# EAGLE board ft231x-breakout-Panel-v11 (EAGLE 7.5.0), part 1 of 9
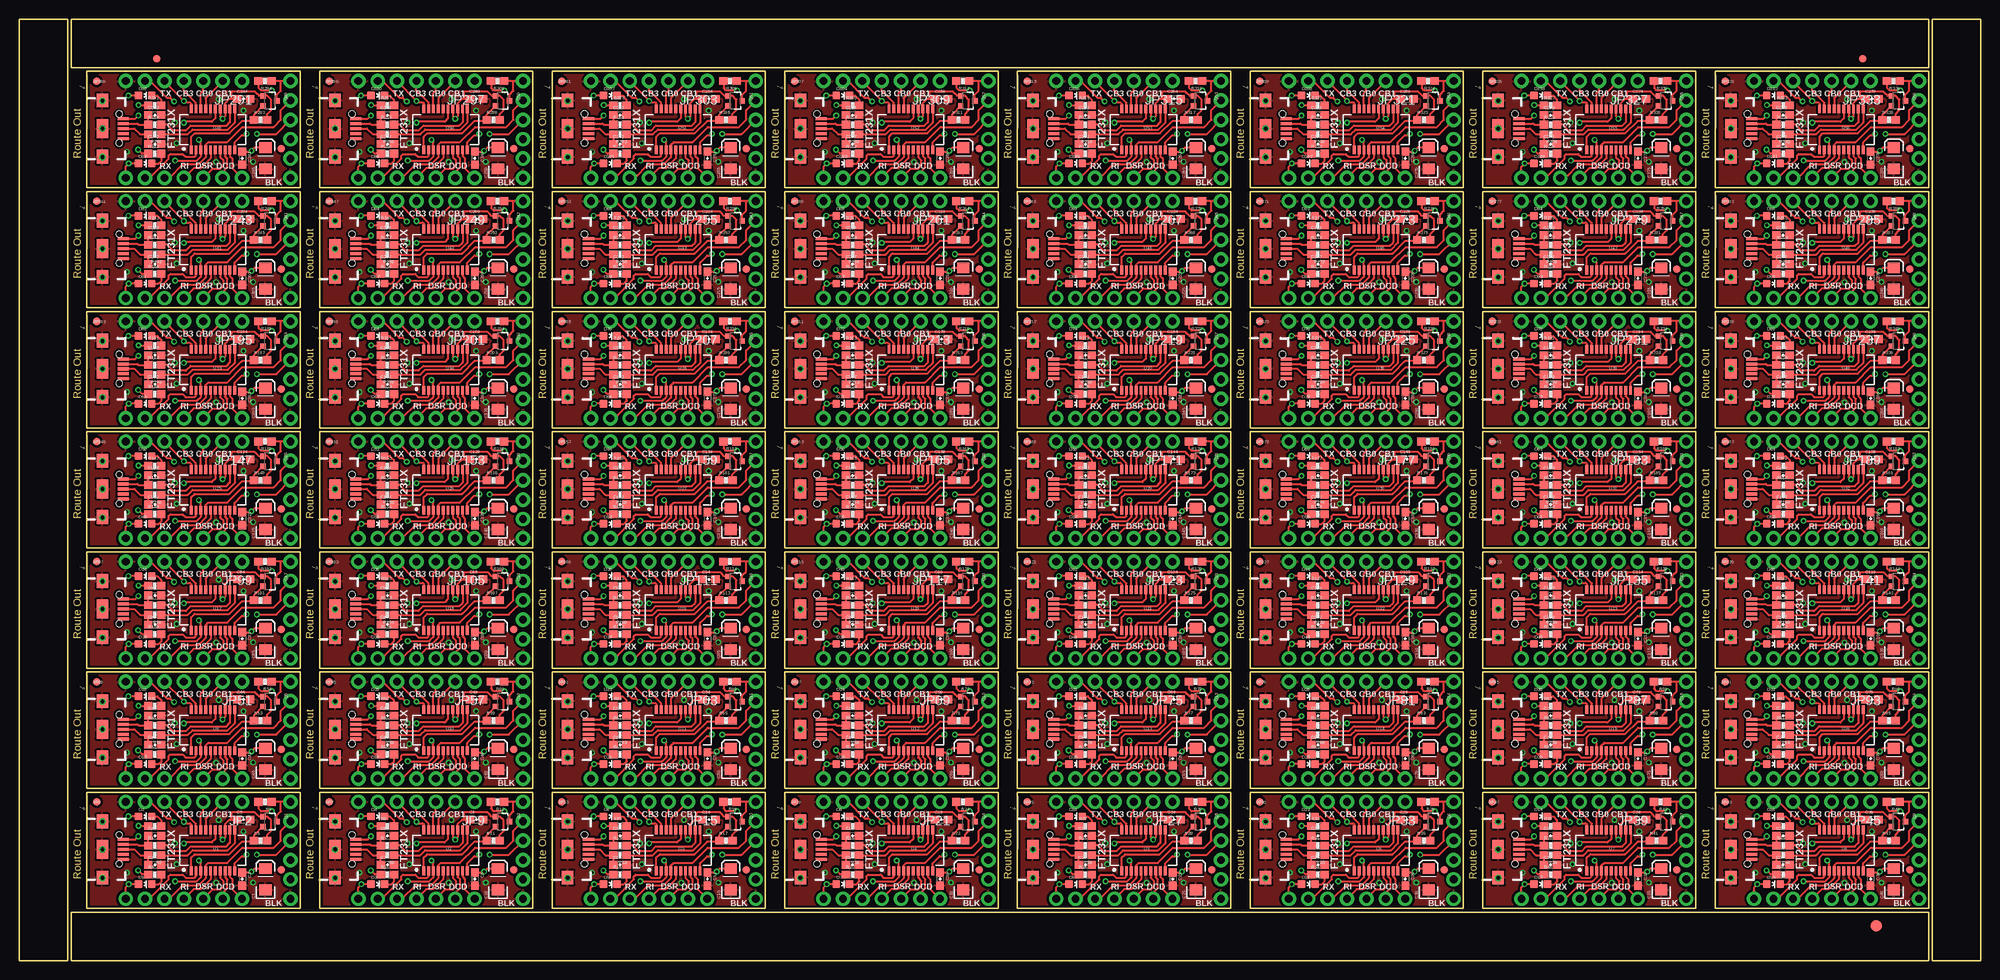
[diagram p0: board, top side]
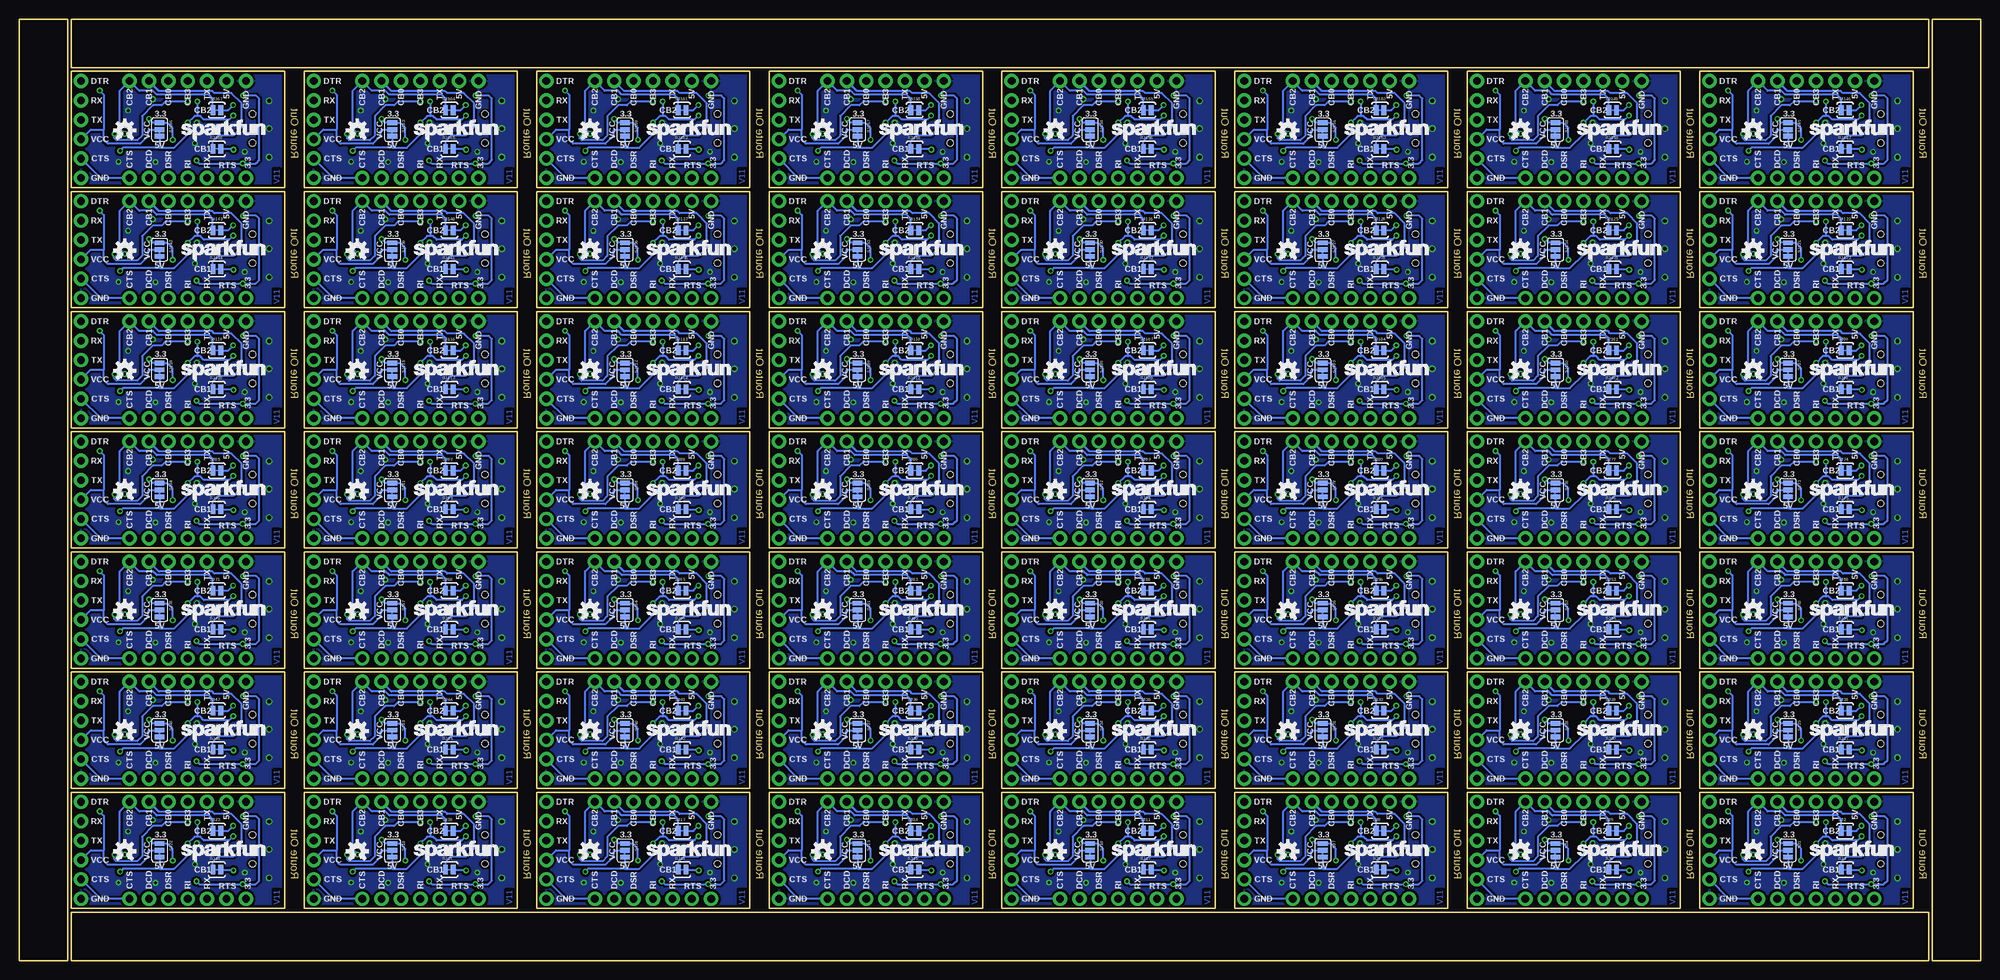
[diagram p1: board, bottom side, seen from below]

Size 257.05 x 123.44 mm. Coordinates in mm from the lower left corner, seen from the top.
Outline: 248 segments
Copper layers (1*16): Top 0.035mm / dielectric 1.5mm / Bottom 0.035mm
Design rules "SparkFun-2-layer-TIGHT": minimum track width 7mil, minimum drill 15mil, track to track 7mil, track to pad 7mil, pad to pad 7mil, via to via 7mil, smd to smd 7mil, copper to edge 7mil, drill to drill 7mil, minimum pad ring 7mil, minimum via ring 7mil, stop-mask expansion 4mil, vias tented up to drill 20mil, thermal gap 10mil

## Footprints (pad centres in the part's own frame; a part is rotated, then mirrored left to right if it is on the bottom)
EIA3216 = smd 1.4 x 1.6: A 1.4,0; C -1.4,0
0603-CAP = smd 1.1 x 1: 1 -0.85,0; 2 0.85,0
LED-0603 = smd 1 x 1: A 0,-0.877; C 0,0.877
FIDUCIAL-1.5X3 = smd 1.5 x 1.5: 1 0,0
FIDUCIAL-1X2 = smd 1 x 1: 1 0,0
USB-B-MICRO-SMD_V03 = smd 1.45 x 0.4: D+1 2.725,0; D-1 2.725,0.65; GND1 2.725,-1.3; ID1 2.725,-0.65; VBUS1 2.725,1.3 | smd 1.5 x 1.8: SHIELD1 0,3.685; SHIELD2 0,-3.685 | smd 1.5 x 2.5: SHIELD3 0,0 | hole 0.85: 2.2,1.9; 2.2,-1.9
1X07_NO_SILK = drill 1.016 pad 1.88: 1 0,0; 2 2.54,0; 3 5.08,0; 4 7.62,0; 5 10.16,0; 6 12.7,0; 7 15.24,0
1X06_NO_SILK = drill 1.016 pad 1.88: 1 0,0; 2 2.54,0; 3 5.08,0; 4 7.62,0; 5 10.16,0; 6 12.7,0
SOT323 = smd 0.7 x 0.7: 1 -0.65,-0.925; 2 0.65,-0.925; 3 0,0.925
0603-RES = smd 1.1 x 1: 1 -0.85,0; 2 0.85,0
0603-RES@1 = smd 1.1 x 1: 1 -0.85,0; 2 0.85,0
SJ_3 = smd 0.635 x 1.27: 1 -0.889,0; 2 0,0; 3 0.889,0
SJ_2S-TRACE = smd 0.635 x 1.27: 1 -0.508,0; 2 0.508,0
PAD-JUMPER-2-NC_BY_TRACE_YES_SILK = smd 0.635 x 1.27: 1 -0.508,0; 2 0.508,0
SSOP20_L = smd 0.381 x 1.143: 1 -2.857,-2.68; 2 -2.223,-2.68; 3 -1.587,-2.68; 4 -0.953,-2.68; 5 -0.318,-2.68; 6 0.318,-2.68; 7 0.953,-2.68; 8 1.587,-2.68; 9 2.223,-2.68; 10 2.857,-2.68; 11 2.857,2.68; 12 2.223,2.68; 13 1.587,2.68; 14 0.953,2.68; 15 0.318,2.68; 16 -0.318,2.68; 17 -0.953,2.68; 18 -1.587,2.68; 19 -2.223,2.68; 20 -2.857,2.68

## Placement (x,y rotation side)
C1  10uF  [EIA3216]  32.28,10.69 90 top
C2  0.1uF  [0603-CAP]  29.24,10.72 270 top
C3  47pF  [0603-CAP]  17.78,12.57 0 top
C4  47pF  [0603-CAP]  17.78,16.38 0 top
C5  0.1uF  [0603-CAP]  29.43,18.5 0 top
C6  0.1uF  [0603-CAP]  59.72,10.72 270 top
C7  47pF  [0603-CAP]  48.26,12.57 0 top
C8  47pF  [0603-CAP]  48.26,16.38 0 top
C9  0.1uF  [0603-CAP]  59.91,18.5 0 top
C10  10uF  [EIA3216]  62.76,10.69 90 top
C11  0.1uF  [0603-CAP]  90.2,10.72 270 top
C12  47pF  [0603-CAP]  78.74,12.57 0 top
C13  47pF  [0603-CAP]  78.74,16.38 0 top
C14  0.1uF  [0603-CAP]  90.39,18.5 0 top
C15  10uF  [EIA3216]  93.24,10.69 90 top
C16  0.1uF  [0603-CAP]  120.68,10.72 270 top
C17  47pF  [0603-CAP]  109.22,12.57 0 top
C18  47pF  [0603-CAP]  109.22,16.38 0 top
C19  0.1uF  [0603-CAP]  120.87,18.5 0 top
C20  10uF  [EIA3216]  123.72,10.69 90 top
C21  0.1uF  [0603-CAP]  151.16,10.72 270 top
C22  47pF  [0603-CAP]  139.7,12.57 0 top
C23  47pF  [0603-CAP]  139.7,16.38 0 top
C24  0.1uF  [0603-CAP]  151.35,18.5 0 top
C25  10uF  [EIA3216]  154.2,10.69 90 top
C26  0.1uF  [0603-CAP]  181.64,10.72 270 top
C27  47pF  [0603-CAP]  170.18,12.57 0 top
C28  47pF  [0603-CAP]  170.18,16.38 0 top
C29  0.1uF  [0603-CAP]  181.83,18.5 0 top
C30  10uF  [EIA3216]  184.68,10.69 90 top
C31  0.1uF  [0603-CAP]  212.12,10.72 270 top
C32  47pF  [0603-CAP]  200.66,12.57 0 top
C33  47pF  [0603-CAP]  200.66,16.38 0 top
C34  0.1uF  [0603-CAP]  212.31,18.5 0 top
C35  10uF  [EIA3216]  215.16,10.69 90 top
C36  0.1uF  [0603-CAP]  242.6,10.72 270 top
C37  47pF  [0603-CAP]  231.14,12.57 0 top
C38  47pF  [0603-CAP]  231.14,16.38 0 top
C39  0.1uF  [0603-CAP]  242.79,18.5 0 top
C40  10uF  [EIA3216]  245.64,10.69 90 top
C41  0.1uF  [0603-CAP]  29.24,26.47 270 top
C42  47pF  [0603-CAP]  17.78,28.32 0 top
C43  47pF  [0603-CAP]  17.78,32.13 0 top
C44  0.1uF  [0603-CAP]  29.43,34.25 0 top
C45  10uF  [EIA3216]  32.28,26.44 90 top
C46  0.1uF  [0603-CAP]  59.72,26.47 270 top
C47  47pF  [0603-CAP]  48.26,28.32 0 top
C48  47pF  [0603-CAP]  48.26,32.13 0 top
C49  0.1uF  [0603-CAP]  59.91,34.25 0 top
C50  10uF  [EIA3216]  62.76,26.44 90 top
C51  0.1uF  [0603-CAP]  90.2,26.47 270 top
C52  47pF  [0603-CAP]  78.74,28.32 0 top
C53  47pF  [0603-CAP]  78.74,32.13 0 top
C54  0.1uF  [0603-CAP]  90.39,34.25 0 top
C55  10uF  [EIA3216]  93.24,26.44 90 top
C56  0.1uF  [0603-CAP]  120.68,26.47 270 top
C57  47pF  [0603-CAP]  109.22,28.32 0 top
C58  47pF  [0603-CAP]  109.22,32.13 0 top
C59  0.1uF  [0603-CAP]  120.87,34.25 0 top
C60  10uF  [EIA3216]  123.72,26.44 90 top
C61  0.1uF  [0603-CAP]  151.16,26.47 270 top
C62  47pF  [0603-CAP]  139.7,28.32 0 top
C63  47pF  [0603-CAP]  139.7,32.13 0 top
C64  0.1uF  [0603-CAP]  151.35,34.25 0 top
C65  10uF  [EIA3216]  154.2,26.44 90 top
C66  0.1uF  [0603-CAP]  181.64,26.47 270 top
C67  47pF  [0603-CAP]  170.18,28.32 0 top
C68  47pF  [0603-CAP]  170.18,32.13 0 top
C69  0.1uF  [0603-CAP]  181.83,34.25 0 top
C70  10uF  [EIA3216]  184.68,26.44 90 top
C71  0.1uF  [0603-CAP]  212.12,26.47 270 top
C72  47pF  [0603-CAP]  200.66,28.32 0 top
C73  47pF  [0603-CAP]  200.66,32.13 0 top
C74  0.1uF  [0603-CAP]  212.31,34.25 0 top
C75  10uF  [EIA3216]  215.16,26.44 90 top
C76  0.1uF  [0603-CAP]  242.6,26.47 270 top
C77  47pF  [0603-CAP]  231.14,28.32 0 top
C78  47pF  [0603-CAP]  231.14,32.13 0 top
C79  0.1uF  [0603-CAP]  242.79,34.25 0 top
C80  10uF  [EIA3216]  245.64,26.44 90 top
C81  0.1uF  [0603-CAP]  29.24,42.21 270 top
C82  47pF  [0603-CAP]  17.78,44.07 0 top
C83  47pF  [0603-CAP]  17.78,47.88 0 top
C84  0.1uF  [0603-CAP]  29.43,50 0 top
C85  10uF  [EIA3216]  32.28,42.19 90 top
C86  0.1uF  [0603-CAP]  59.72,42.21 270 top
C87  47pF  [0603-CAP]  48.26,44.07 0 top
C88  47pF  [0603-CAP]  48.26,47.88 0 top
C89  0.1uF  [0603-CAP]  59.91,50 0 top
C90  10uF  [EIA3216]  62.76,42.19 90 top
C91  0.1uF  [0603-CAP]  90.2,42.21 270 top
C92  47pF  [0603-CAP]  78.74,44.07 0 top
C93  47pF  [0603-CAP]  78.74,47.88 0 top
C94  0.1uF  [0603-CAP]  90.39,50 0 top
C95  10uF  [EIA3216]  93.24,42.19 90 top
C96  0.1uF  [0603-CAP]  120.68,42.21 270 top
C97  47pF  [0603-CAP]  109.22,44.07 0 top
C98  47pF  [0603-CAP]  109.22,47.88 0 top
C99  0.1uF  [0603-CAP]  120.87,50 0 top
C100  10uF  [EIA3216]  123.72,42.19 90 top
C101  0.1uF  [0603-CAP]  151.16,42.21 270 top
C102  47pF  [0603-CAP]  139.7,44.07 0 top
C103  47pF  [0603-CAP]  139.7,47.88 0 top
C104  0.1uF  [0603-CAP]  151.35,50 0 top
C105  10uF  [EIA3216]  154.2,42.19 90 top
C106  0.1uF  [0603-CAP]  181.64,42.21 270 top
C107  47pF  [0603-CAP]  170.18,44.07 0 top
C108  47pF  [0603-CAP]  170.18,47.88 0 top
C109  0.1uF  [0603-CAP]  181.83,50 0 top
C110  10uF  [EIA3216]  184.68,42.19 90 top
C111  0.1uF  [0603-CAP]  212.12,42.21 270 top
C112  47pF  [0603-CAP]  200.66,44.07 0 top
C113  47pF  [0603-CAP]  200.66,47.88 0 top
C114  0.1uF  [0603-CAP]  212.31,50 0 top
C115  10uF  [EIA3216]  215.16,42.19 90 top
C116  0.1uF  [0603-CAP]  242.6,42.21 270 top
C117  47pF  [0603-CAP]  231.14,44.07 0 top
C118  47pF  [0603-CAP]  231.14,47.88 0 top
C119  0.1uF  [0603-CAP]  242.79,50 0 top
C120  10uF  [EIA3216]  245.64,42.19 90 top
C121  0.1uF  [0603-CAP]  29.24,57.96 270 top
C122  47pF  [0603-CAP]  17.78,59.82 0 top
C123  47pF  [0603-CAP]  17.78,63.63 0 top
C124  0.1uF  [0603-CAP]  29.43,65.75 0 top
C125  10uF  [EIA3216]  32.28,57.94 90 top
C126  0.1uF  [0603-CAP]  59.72,57.96 270 top
C127  47pF  [0603-CAP]  48.26,59.82 0 top
C128  47pF  [0603-CAP]  48.26,63.63 0 top
C129  0.1uF  [0603-CAP]  59.91,65.75 0 top
C130  10uF  [EIA3216]  62.76,57.94 90 top
C131  0.1uF  [0603-CAP]  90.2,57.96 270 top
C132  47pF  [0603-CAP]  78.74,59.82 0 top
C133  47pF  [0603-CAP]  78.74,63.63 0 top
C134  0.1uF  [0603-CAP]  90.39,65.75 0 top
C135  10uF  [EIA3216]  93.24,57.94 90 top
C136  0.1uF  [0603-CAP]  120.68,57.96 270 top
C137  47pF  [0603-CAP]  109.22,59.82 0 top
C138  47pF  [0603-CAP]  109.22,63.63 0 top
C139  0.1uF  [0603-CAP]  120.87,65.75 0 top
C140  10uF  [EIA3216]  123.72,57.94 90 top
C141  0.1uF  [0603-CAP]  151.16,57.96 270 top
C142  47pF  [0603-CAP]  139.7,59.82 0 top
C143  47pF  [0603-CAP]  139.7,63.63 0 top
C144  0.1uF  [0603-CAP]  151.35,65.75 0 top
C145  10uF  [EIA3216]  154.2,57.94 90 top
C146  0.1uF  [0603-CAP]  181.64,57.96 270 top
C147  47pF  [0603-CAP]  170.18,59.82 0 top
C148  47pF  [0603-CAP]  170.18,63.63 0 top
C149  0.1uF  [0603-CAP]  181.83,65.75 0 top
C150  10uF  [EIA3216]  184.68,57.94 90 top
C151  0.1uF  [0603-CAP]  212.12,57.96 270 top
C152  47pF  [0603-CAP]  200.66,59.82 0 top
C153  47pF  [0603-CAP]  200.66,63.63 0 top
C154  0.1uF  [0603-CAP]  212.31,65.75 0 top
C155  10uF  [EIA3216]  215.16,57.94 90 top
C156  0.1uF  [0603-CAP]  242.6,57.96 270 top
C157  47pF  [0603-CAP]  231.14,59.82 0 top
C158  47pF  [0603-CAP]  231.14,63.63 0 top
C159  0.1uF  [0603-CAP]  242.79,65.75 0 top
C160  10uF  [EIA3216]  245.64,57.94 90 top
C161  0.1uF  [0603-CAP]  29.24,73.71 270 top
C162  47pF  [0603-CAP]  17.78,75.56 0 top
C163  47pF  [0603-CAP]  17.78,79.38 0 top
C164  0.1uF  [0603-CAP]  29.43,81.5 0 top
C165  10uF  [EIA3216]  32.28,73.69 90 top
C166  0.1uF  [0603-CAP]  59.72,73.71 270 top
C167  47pF  [0603-CAP]  48.26,75.56 0 top
C168  47pF  [0603-CAP]  48.26,79.38 0 top
C169  0.1uF  [0603-CAP]  59.91,81.5 0 top
C170  10uF  [EIA3216]  62.76,73.69 90 top
C171  0.1uF  [0603-CAP]  90.2,73.71 270 top
C172  47pF  [0603-CAP]  78.74,75.56 0 top
C173  47pF  [0603-CAP]  78.74,79.38 0 top
C174  0.1uF  [0603-CAP]  90.39,81.5 0 top
C175  10uF  [EIA3216]  93.24,73.69 90 top
C176  0.1uF  [0603-CAP]  120.68,73.71 270 top
C177  47pF  [0603-CAP]  109.22,75.56 0 top
C178  47pF  [0603-CAP]  109.22,79.38 0 top
C179  0.1uF  [0603-CAP]  120.87,81.5 0 top
C180  10uF  [EIA3216]  123.72,73.69 90 top
C181  0.1uF  [0603-CAP]  151.16,73.71 270 top
C182  47pF  [0603-CAP]  139.7,75.56 0 top
C183  47pF  [0603-CAP]  139.7,79.38 0 top
C184  0.1uF  [0603-CAP]  151.35,81.5 0 top
C185  10uF  [EIA3216]  154.2,73.69 90 top
C186  0.1uF  [0603-CAP]  181.64,73.71 270 top
C187  47pF  [0603-CAP]  170.18,75.56 0 top
C188  47pF  [0603-CAP]  170.18,79.38 0 top
C189  0.1uF  [0603-CAP]  181.83,81.5 0 top
C190  10uF  [EIA3216]  184.68,73.69 90 top
C191  0.1uF  [0603-CAP]  212.12,73.71 270 top
C192  47pF  [0603-CAP]  200.66,75.56 0 top
C193  47pF  [0603-CAP]  200.66,79.38 0 top
C194  0.1uF  [0603-CAP]  212.31,81.5 0 top
C195  10uF  [EIA3216]  215.16,73.69 90 top
C196  0.1uF  [0603-CAP]  242.6,73.71 270 top
C197  47pF  [0603-CAP]  231.14,75.56 0 top
C198  47pF  [0603-CAP]  231.14,79.38 0 top
C199  0.1uF  [0603-CAP]  242.79,81.5 0 top
C200  10uF  [EIA3216]  245.64,73.69 90 top
C201  0.1uF  [0603-CAP]  29.24,89.46 270 top
C202  47pF  [0603-CAP]  17.78,91.31 0 top
C203  47pF  [0603-CAP]  17.78,95.12 0 top
C204  0.1uF  [0603-CAP]  29.43,97.24 0 top
C205  10uF  [EIA3216]  32.28,89.43 90 top
C206  0.1uF  [0603-CAP]  59.72,89.46 270 top
C207  47pF  [0603-CAP]  48.26,91.31 0 top
C208  47pF  [0603-CAP]  48.26,95.12 0 top
C209  0.1uF  [0603-CAP]  59.91,97.24 0 top
C210  10uF  [EIA3216]  62.76,89.43 90 top
C211  0.1uF  [0603-CAP]  90.2,89.46 270 top
C212  47pF  [0603-CAP]  78.74,91.31 0 top
C213  47pF  [0603-CAP]  78.74,95.12 0 top
C214  0.1uF  [0603-CAP]  90.39,97.24 0 top
C215  10uF  [EIA3216]  93.24,89.43 90 top
C216  0.1uF  [0603-CAP]  120.68,89.46 270 top
C217  47pF  [0603-CAP]  109.22,91.31 0 top
C218  47pF  [0603-CAP]  109.22,95.12 0 top
C219  0.1uF  [0603-CAP]  120.87,97.24 0 top
C220  10uF  [EIA3216]  123.72,89.43 90 top
C221  0.1uF  [0603-CAP]  151.16,89.46 270 top
C222  47pF  [0603-CAP]  139.7,91.31 0 top
C223  47pF  [0603-CAP]  139.7,95.12 0 top
C224  0.1uF  [0603-CAP]  151.35,97.24 0 top
C225  10uF  [EIA3216]  154.2,89.43 90 top
C226  0.1uF  [0603-CAP]  181.64,89.46 270 top
C227  47pF  [0603-CAP]  170.18,91.31 0 top
C228  47pF  [0603-CAP]  170.18,95.12 0 top
C229  0.1uF  [0603-CAP]  181.83,97.24 0 top
C230  10uF  [EIA3216]  184.68,89.43 90 top
C231  0.1uF  [0603-CAP]  212.12,89.46 270 top
C232  47pF  [0603-CAP]  200.66,91.31 0 top
C233  47pF  [0603-CAP]  200.66,95.12 0 top
C234  0.1uF  [0603-CAP]  212.31,97.24 0 top
C235  10uF  [EIA3216]  215.16,89.43 90 top
C236  0.1uF  [0603-CAP]  242.6,89.46 270 top
C237  47pF  [0603-CAP]  231.14,91.31 0 top
C238  47pF  [0603-CAP]  231.14,95.12 0 top
C239  0.1uF  [0603-CAP]  242.79,97.24 0 top
C240  10uF  [EIA3216]  245.64,89.43 90 top
C241  0.1uF  [0603-CAP]  29.24,105.21 270 top
C242  47pF  [0603-CAP]  17.78,107.06 0 top
C243  47pF  [0603-CAP]  17.78,110.87 0 top
C244  0.1uF  [0603-CAP]  29.43,112.99 0 top
C245  10uF  [EIA3216]  32.28,105.18 90 top
C246  0.1uF  [0603-CAP]  59.72,105.21 270 top
C247  47pF  [0603-CAP]  48.26,107.06 0 top
C248  47pF  [0603-CAP]  48.26,110.87 0 top
C249  0.1uF  [0603-CAP]  59.91,112.99 0 top
C250  10uF  [EIA3216]  62.76,105.18 90 top
C251  0.1uF  [0603-CAP]  90.2,105.21 270 top
C252  47pF  [0603-CAP]  78.74,107.06 0 top
C253  47pF  [0603-CAP]  78.74,110.87 0 top
C254  0.1uF  [0603-CAP]  90.39,112.99 0 top
C255  10uF  [EIA3216]  93.24,105.18 90 top
C256  0.1uF  [0603-CAP]  120.68,105.21 270 top
C257  47pF  [0603-CAP]  109.22,107.06 0 top
C258  47pF  [0603-CAP]  109.22,110.87 0 top
C259  0.1uF  [0603-CAP]  120.87,112.99 0 top
C260  10uF  [EIA3216]  123.72,105.18 90 top
C261  0.1uF  [0603-CAP]  151.16,105.21 270 top
C262  47pF  [0603-CAP]  139.7,107.06 0 top
C263  47pF  [0603-CAP]  139.7,110.87 0 top
C264  0.1uF  [0603-CAP]  151.35,112.99 0 top
C265  10uF  [EIA3216]  154.2,105.18 90 top
C266  0.1uF  [0603-CAP]  181.64,105.21 270 top
C267  47pF  [0603-CAP]  170.18,107.06 0 top
C268  47pF  [0603-CAP]  170.18,110.87 0 top
C269  0.1uF  [0603-CAP]  181.83,112.99 0 top
C270  10uF  [EIA3216]  184.68,105.18 90 top
C271  0.1uF  [0603-CAP]  212.12,105.21 270 top
C272  47pF  [0603-CAP]  200.66,107.06 0 top
C273  47pF  [0603-CAP]  200.66,110.87 0 top
C274  0.1uF  [0603-CAP]  212.31,112.99 0 top
C275  10uF  [EIA3216]  215.16,105.18 90 top
C276  0.1uF  [0603-CAP]  242.6,105.21 270 top
C277  47pF  [0603-CAP]  231.14,107.06 0 top
C278  47pF  [0603-CAP]  231.14,110.87 0 top
C279  0.1uF  [0603-CAP]  242.79,112.99 0 top
C280  10uF  [EIA3216]  245.64,105.18 90 top
D1  RED  [LED-0603]  16.51,10.03 270 top
D2  Yellow  [LED-0603]  16.51,18.92 270 top
D3  RED  [LED-0603]  46.99,10.03 270 top
D4  Yellow  [LED-0603]  46.99,18.92 270 top
D5  RED  [LED-0603]  77.47,10.03 270 top
D6  Yellow  [LED-0603]  77.47,18.92 270 top
D7  RED  [LED-0603]  107.95,10.03 270 top
D8  Yellow  [LED-0603]  107.95,18.92 270 top
D9  RED  [LED-0603]  138.43,10.03 270 top
D10  Yellow  [LED-0603]  138.43,18.92 270 top
D11  RED  [LED-0603]  168.91,10.03 270 top
D12  Yellow  [LED-0603]  168.91,18.92 270 top
D13  RED  [LED-0603]  199.39,10.03 270 top
D14  Yellow  [LED-0603]  199.39,18.92 270 top
D15  RED  [LED-0603]  229.87,10.03 270 top
D16  Yellow  [LED-0603]  229.87,18.92 270 top
D17  RED  [LED-0603]  16.51,25.78 270 top
D18  Yellow  [LED-0603]  16.51,34.67 270 top
D19  RED  [LED-0603]  46.99,25.78 270 top
D20  Yellow  [LED-0603]  46.99,34.67 270 top
D21  RED  [LED-0603]  77.47,25.78 270 top
D22  Yellow  [LED-0603]  77.47,34.67 270 top
D23  RED  [LED-0603]  107.95,25.78 270 top
D24  Yellow  [LED-0603]  107.95,34.67 270 top
D25  RED  [LED-0603]  138.43,25.78 270 top
D26  Yellow  [LED-0603]  138.43,34.67 270 top
D27  RED  [LED-0603]  168.91,25.78 270 top
D28  Yellow  [LED-0603]  168.91,34.67 270 top
D29  RED  [LED-0603]  199.39,25.78 270 top
D30  Yellow  [LED-0603]  199.39,34.67 270 top
D31  RED  [LED-0603]  229.87,25.78 270 top
D32  Yellow  [LED-0603]  229.87,34.67 270 top
D33  RED  [LED-0603]  16.51,41.53 270 top
D34  Yellow  [LED-0603]  16.51,50.42 270 top
D35  RED  [LED-0603]  46.99,41.53 270 top
D36  Yellow  [LED-0603]  46.99,50.42 270 top
D37  RED  [LED-0603]  77.47,41.53 270 top
D38  Yellow  [LED-0603]  77.47,50.42 270 top
D39  RED  [LED-0603]  107.95,41.53 270 top
D40  Yellow  [LED-0603]  107.95,50.42 270 top
D41  RED  [LED-0603]  138.43,41.53 270 top
D42  Yellow  [LED-0603]  138.43,50.42 270 top
D43  RED  [LED-0603]  168.91,41.53 270 top
D44  Yellow  [LED-0603]  168.91,50.42 270 top
D45  RED  [LED-0603]  199.39,41.53 270 top
D46  Yellow  [LED-0603]  199.39,50.42 270 top
D47  RED  [LED-0603]  229.87,41.53 270 top
D48  Yellow  [LED-0603]  229.87,50.42 270 top
D49  RED  [LED-0603]  16.51,57.28 270 top
D50  Yellow  [LED-0603]  16.51,66.17 270 top
D51  RED  [LED-0603]  46.99,57.28 270 top
D52  Yellow  [LED-0603]  46.99,66.17 270 top
D53  RED  [LED-0603]  77.47,57.28 270 top
D54  Yellow  [LED-0603]  77.47,66.17 270 top
D55  RED  [LED-0603]  107.95,57.28 270 top
D56  Yellow  [LED-0603]  107.95,66.17 270 top
D57  RED  [LED-0603]  138.43,57.28 270 top
D58  Yellow  [LED-0603]  138.43,66.17 270 top
D59  RED  [LED-0603]  168.91,57.28 270 top
D60  Yellow  [LED-0603]  168.91,66.17 270 top
D61  RED  [LED-0603]  199.39,57.28 270 top
D62  Yellow  [LED-0603]  199.39,66.17 270 top
D63  RED  [LED-0603]  229.87,57.28 270 top
D64  Yellow  [LED-0603]  229.87,66.17 270 top
D65  RED  [LED-0603]  16.51,73.03 270 top
D66  Yellow  [LED-0603]  16.51,81.92 270 top
D67  RED  [LED-0603]  46.99,73.03 270 top
D68  Yellow  [LED-0603]  46.99,81.92 270 top
D69  RED  [LED-0603]  77.47,73.03 270 top
D70  Yellow  [LED-0603]  77.47,81.92 270 top
D71  RED  [LED-0603]  107.95,73.03 270 top
D72  Yellow  [LED-0603]  107.95,81.92 270 top
D73  RED  [LED-0603]  138.43,73.03 270 top
D74  Yellow  [LED-0603]  138.43,81.92 270 top
D75  RED  [LED-0603]  168.91,73.03 270 top
D76  Yellow  [LED-0603]  168.91,81.92 270 top
D77  RED  [LED-0603]  199.39,73.03 270 top
D78  Yellow  [LED-0603]  199.39,81.92 270 top
D79  RED  [LED-0603]  229.87,73.03 270 top
D80  Yellow  [LED-0603]  229.87,81.92 270 top
D81  RED  [LED-0603]  16.51,88.77 270 top
D82  Yellow  [LED-0603]  16.51,97.66 270 top
D83  RED  [LED-0603]  46.99,88.77 270 top
D84  Yellow  [LED-0603]  46.99,97.66 270 top
D85  RED  [LED-0603]  77.47,88.77 270 top
D86  Yellow  [LED-0603]  77.47,97.66 270 top
D87  RED  [LED-0603]  107.95,88.77 270 top
D88  Yellow  [LED-0603]  107.95,97.66 270 top
D89  RED  [LED-0603]  138.43,88.77 270 top
D90  Yellow  [LED-0603]  138.43,97.66 270 top
D91  RED  [LED-0603]  168.91,88.77 270 top
D92  Yellow  [LED-0603]  168.91,97.66 270 top
D93  RED  [LED-0603]  199.39,88.77 270 top
D94  Yellow  [LED-0603]  199.39,97.66 270 top
D95  RED  [LED-0603]  229.87,88.77 270 top
D96  Yellow  [LED-0603]  229.87,97.66 270 top
D97  RED  [LED-0603]  16.51,104.52 270 top
D98  Yellow  [LED-0603]  16.51,113.41 270 top
D99  RED  [LED-0603]  46.99,104.52 270 top
D100  Yellow  [LED-0603]  46.99,113.41 270 top
D101  RED  [LED-0603]  77.47,104.52 270 top
D102  Yellow  [LED-0603]  77.47,113.41 270 top
D103  RED  [LED-0603]  107.95,104.52 270 top
D104  Yellow  [LED-0603]  107.95,113.41 270 top
D105  RED  [LED-0603]  138.43,104.52 270 top
D106  Yellow  [LED-0603]  138.43,113.41 270 top
D107  RED  [LED-0603]  168.91,104.52 270 top
D108  Yellow  [LED-0603]  168.91,113.41 270 top
D109  RED  [LED-0603]  199.39,104.52 270 top
D110  Yellow  [LED-0603]  199.39,113.41 270 top
D111  RED  [LED-0603]  229.87,104.52 270 top
D112  Yellow  [LED-0603]  229.87,113.41 270 top
E$1  [FIDUCIAL-1.5X3]  243.33,4.57 0 top
E$5  [FIDUCIAL-1X2]  241.55,118.24 90 top
E$6  [FIDUCIAL-1X2]  18.03,118.24 270 top
JP1  USB-MICROB"  [USB-B-MICRO-SMD_V03]  10.92,14.61 0 top
JP2  [1X07_NO_SILK]  29.21,20.83 180 top
JP3  [1X06_NO_SILK]  35.56,8.13 90 top
JP4  [1X07_NO_SILK]  29.21,8.13 180 top
JP5  FIDUCIAL1X2  [FIDUCIAL-1X2]  34.34,11.95 0 top
JP6  FIDUCIAL1X2  [FIDUCIAL-1X2]  10.16,20.83 0 top
JP7  USB-MICROB"  [USB-B-MICRO-SMD_V03]  41.4,14.61 0 top
JP8  [1X06_NO_SILK]  66.04,8.13 90 top
JP9  [1X07_NO_SILK]  59.69,20.83 180 top
JP10  [1X07_NO_SILK]  59.69,8.13 180 top
JP11  FIDUCIAL1X2  [FIDUCIAL-1X2]  40.64,20.83 0 top
JP12  FIDUCIAL1X2  [FIDUCIAL-1X2]  64.82,11.95 0 top
JP13  USB-MICROB"  [USB-B-MICRO-SMD_V03]  71.88,14.61 0 top
JP14  [1X06_NO_SILK]  96.52,8.13 90 top
JP15  [1X07_NO_SILK]  90.17,20.83 180 top
JP16  [1X07_NO_SILK]  90.17,8.13 180 top
JP17  FIDUCIAL1X2  [FIDUCIAL-1X2]  71.12,20.83 0 top
JP18  FIDUCIAL1X2  [FIDUCIAL-1X2]  95.3,11.95 0 top
JP19  USB-MICROB"  [USB-B-MICRO-SMD_V03]  102.36,14.61 0 top
JP20  [1X06_NO_SILK]  127,8.13 90 top
JP21  [1X07_NO_SILK]  120.65,20.83 180 top
JP22  [1X07_NO_SILK]  120.65,8.13 180 top
JP23  FIDUCIAL1X2  [FIDUCIAL-1X2]  101.6,20.83 0 top
JP24  FIDUCIAL1X2  [FIDUCIAL-1X2]  125.78,11.95 0 top
JP25  USB-MICROB"  [USB-B-MICRO-SMD_V03]  132.84,14.61 0 top
JP26  [1X06_NO_SILK]  157.48,8.13 90 top
JP27  [1X07_NO_SILK]  151.13,20.83 180 top
JP28  [1X07_NO_SILK]  151.13,8.13 180 top
JP29  FIDUCIAL1X2  [FIDUCIAL-1X2]  132.08,20.83 0 top
JP30  FIDUCIAL1X2  [FIDUCIAL-1X2]  156.26,11.95 0 top
JP31  USB-MICROB"  [USB-B-MICRO-SMD_V03]  163.32,14.61 0 top
JP32  [1X06_NO_SILK]  187.96,8.13 90 top
JP33  [1X07_NO_SILK]  181.61,20.83 180 top
JP34  [1X07_NO_SILK]  181.61,8.13 180 top
JP35  FIDUCIAL1X2  [FIDUCIAL-1X2]  162.56,20.83 0 top
JP36  FIDUCIAL1X2  [FIDUCIAL-1X2]  186.74,11.95 0 top
JP37  USB-MICROB"  [USB-B-MICRO-SMD_V03]  193.8,14.61 0 top
JP38  [1X06_NO_SILK]  218.44,8.13 90 top
JP39  [1X07_NO_SILK]  212.09,20.83 180 top
JP40  [1X07_NO_SILK]  212.09,8.13 180 top
JP41  FIDUCIAL1X2  [FIDUCIAL-1X2]  193.04,20.83 0 top
JP42  FIDUCIAL1X2  [FIDUCIAL-1X2]  217.22,11.95 0 top
JP43  USB-MICROB"  [USB-B-MICRO-SMD_V03]  224.28,14.61 0 top
JP44  [1X06_NO_SILK]  248.92,8.13 90 top
JP45  [1X07_NO_SILK]  242.57,20.83 180 top
JP46  [1X07_NO_SILK]  242.57,8.13 180 top
JP47  FIDUCIAL1X2  [FIDUCIAL-1X2]  223.52,20.83 0 top
JP48  FIDUCIAL1X2  [FIDUCIAL-1X2]  247.7,11.95 0 top
JP49  USB-MICROB"  [USB-B-MICRO-SMD_V03]  10.92,30.35 0 top
JP50  [1X06_NO_SILK]  35.56,23.88 90 top
JP51  [1X07_NO_SILK]  29.21,36.58 180 top
JP52  [1X07_NO_SILK]  29.21,23.88 180 top
JP53  FIDUCIAL1X2  [FIDUCIAL-1X2]  10.16,36.58 0 top
JP54  FIDUCIAL1X2  [FIDUCIAL-1X2]  34.34,27.7 0 top
JP55  USB-MICROB"  [USB-B-MICRO-SMD_V03]  41.4,30.35 0 top
JP56  [1X06_NO_SILK]  66.04,23.88 90 top
JP57  [1X07_NO_SILK]  59.69,36.58 180 top
JP58  [1X07_NO_SILK]  59.69,23.88 180 top
JP59  FIDUCIAL1X2  [FIDUCIAL-1X2]  40.64,36.58 0 top
JP60  FIDUCIAL1X2  [FIDUCIAL-1X2]  64.82,27.7 0 top
JP61  USB-MICROB"  [USB-B-MICRO-SMD_V03]  71.88,30.35 0 top
JP62  [1X06_NO_SILK]  96.52,23.88 90 top
JP63  [1X07_NO_SILK]  90.17,36.58 180 top
JP64  [1X07_NO_SILK]  90.17,23.88 180 top
JP65  FIDUCIAL1X2  [FIDUCIAL-1X2]  71.12,36.58 0 top
JP66  FIDUCIAL1X2  [FIDUCIAL-1X2]  95.3,27.7 0 top
JP67  USB-MICROB"  [USB-B-MICRO-SMD_V03]  102.36,30.35 0 top
JP68  [1X06_NO_SILK]  127,23.88 90 top
JP69  [1X07_NO_SILK]  120.65,36.58 180 top
JP70  [1X07_NO_SILK]  120.65,23.88 180 top
JP71  FIDUCIAL1X2  [FIDUCIAL-1X2]  101.6,36.58 0 top
JP72  FIDUCIAL1X2  [FIDUCIAL-1X2]  125.78,27.7 0 top
JP73  USB-MICROB"  [USB-B-MICRO-SMD_V03]  132.84,30.35 0 top
JP74  [1X06_NO_SILK]  157.48,23.88 90 top
JP75  [1X07_NO_SILK]  151.13,36.58 180 top
JP76  [1X07_NO_SILK]  151.13,23.88 180 top
JP77  FIDUCIAL1X2  [FIDUCIAL-1X2]  132.08,36.58 0 top
JP78  FIDUCIAL1X2  [FIDUCIAL-1X2]  156.26,27.7 0 top
JP79  USB-MICROB"  [USB-B-MICRO-SMD_V03]  163.32,30.35 0 top
JP80  [1X06_NO_SILK]  187.96,23.88 90 top
JP81  [1X07_NO_SILK]  181.61,36.58 180 top
JP82  [1X07_NO_SILK]  181.61,23.88 180 top
JP83  FIDUCIAL1X2  [FIDUCIAL-1X2]  162.56,36.58 0 top
JP84  FIDUCIAL1X2  [FIDUCIAL-1X2]  186.74,27.7 0 top
JP85  USB-MICROB"  [USB-B-MICRO-SMD_V03]  193.8,30.35 0 top
JP86  [1X06_NO_SILK]  218.44,23.88 90 top
JP87  [1X07_NO_SILK]  212.09,36.58 180 top
JP88  [1X07_NO_SILK]  212.09,23.88 180 top
JP89  FIDUCIAL1X2  [FIDUCIAL-1X2]  193.04,36.58 0 top
JP90  FIDUCIAL1X2  [FIDUCIAL-1X2]  217.22,27.7 0 top
JP91  USB-MICROB"  [USB-B-MICRO-SMD_V03]  224.28,30.35 0 top
JP92  [1X06_NO_SILK]  248.92,23.88 90 top
JP93  [1X07_NO_SILK]  242.57,36.58 180 top
JP94  [1X07_NO_SILK]  242.57,23.88 180 top
JP95  FIDUCIAL1X2  [FIDUCIAL-1X2]  223.52,36.58 0 top
JP96  FIDUCIAL1X2  [FIDUCIAL-1X2]  247.7,27.7 0 top
JP97  USB-MICROB"  [USB-B-MICRO-SMD_V03]  10.92,46.1 0 top
JP98  [1X06_NO_SILK]  35.56,39.62 90 top
JP99  [1X07_NO_SILK]  29.21,52.32 180 top
JP100  [1X07_NO_SILK]  29.21,39.62 180 top
JP101  FIDUCIAL1X2  [FIDUCIAL-1X2]  10.16,52.32 0 top
JP102  FIDUCIAL1X2  [FIDUCIAL-1X2]  34.34,43.45 0 top
JP103  USB-MICROB"  [USB-B-MICRO-SMD_V03]  41.4,46.1 0 top
JP104  [1X06_NO_SILK]  66.04,39.62 90 top
JP105  [1X07_NO_SILK]  59.69,52.32 180 top
JP106  [1X07_NO_SILK]  59.69,39.62 180 top
JP107  FIDUCIAL1X2  [FIDUCIAL-1X2]  40.64,52.32 0 top
JP108  FIDUCIAL1X2  [FIDUCIAL-1X2]  64.82,43.45 0 top
JP109  USB-MICROB"  [USB-B-MICRO-SMD_V03]  71.88,46.1 0 top
JP110  [1X06_NO_SILK]  96.52,39.62 90 top
JP111  [1X07_NO_SILK]  90.17,52.32 180 top
JP112  [1X07_NO_SILK]  90.17,39.62 180 top
JP113  FIDUCIAL1X2  [FIDUCIAL-1X2]  71.12,52.32 0 top
JP114  FIDUCIAL1X2  [FIDUCIAL-1X2]  95.3,43.45 0 top
JP115  USB-MICROB"  [USB-B-MICRO-SMD_V03]  102.36,46.1 0 top
JP116  [1X06_NO_SILK]  127,39.62 90 top
JP117  [1X07_NO_SILK]  120.65,52.32 180 top
JP118  [1X07_NO_SILK]  120.65,39.62 180 top
JP119  FIDUCIAL1X2  [FIDUCIAL-1X2]  101.6,52.32 0 top
JP120  FIDUCIAL1X2  [FIDUCIAL-1X2]  125.78,43.45 0 top
JP121  USB-MICROB"  [USB-B-MICRO-SMD_V03]  132.84,46.1 0 top
JP122  [1X06_NO_SILK]  157.48,39.62 90 top
JP123  [1X07_NO_SILK]  151.13,52.32 180 top
JP124  [1X07_NO_SILK]  151.13,39.62 180 top
JP125  FIDUCIAL1X2  [FIDUCIAL-1X2]  132.08,52.32 0 top
JP126  FIDUCIAL1X2  [FIDUCIAL-1X2]  156.26,43.45 0 top
JP127  USB-MICROB"  [USB-B-MICRO-SMD_V03]  163.32,46.1 0 top
JP128  [1X06_NO_SILK]  187.96,39.62 90 top
JP129  [1X07_NO_SILK]  181.61,52.32 180 top
JP130  [1X07_NO_SILK]  181.61,39.62 180 top
JP131  FIDUCIAL1X2  [FIDUCIAL-1X2]  162.56,52.32 0 top
JP132  FIDUCIAL1X2  [FIDUCIAL-1X2]  186.74,43.45 0 top
JP133  USB-MICROB"  [USB-B-MICRO-SMD_V03]  193.8,46.1 0 top
JP134  [1X06_NO_SILK]  218.44,39.62 90 top
JP135  [1X07_NO_SILK]  212.09,52.32 180 top
JP136  [1X07_NO_SILK]  212.09,39.62 180 top
JP137  FIDUCIAL1X2  [FIDUCIAL-1X2]  193.04,52.32 0 top
JP138  FIDUCIAL1X2  [FIDUCIAL-1X2]  217.22,43.45 0 top
JP139  USB-MICROB"  [USB-B-MICRO-SMD_V03]  224.28,46.1 0 top
JP140  [1X06_NO_SILK]  248.92,39.62 90 top
JP141  [1X07_NO_SILK]  242.57,52.32 180 top
JP142  [1X07_NO_SILK]  242.57,39.62 180 top
JP143  FIDUCIAL1X2  [FIDUCIAL-1X2]  223.52,52.32 0 top
JP144  FIDUCIAL1X2  [FIDUCIAL-1X2]  247.7,43.45 0 top
JP145  USB-MICROB"  [USB-B-MICRO-SMD_V03]  10.92,61.85 0 top
JP146  [1X06_NO_SILK]  35.56,55.37 90 top
JP147  [1X07_NO_SILK]  29.21,68.07 180 top
JP148  [1X07_NO_SILK]  29.21,55.37 180 top
JP149  FIDUCIAL1X2  [FIDUCIAL-1X2]  10.16,68.07 0 top
JP150  FIDUCIAL1X2  [FIDUCIAL-1X2]  34.34,59.19 0 top
JP151  USB-MICROB"  [USB-B-MICRO-SMD_V03]  41.4,61.85 0 top
JP152  [1X06_NO_SILK]  66.04,55.37 90 top
JP153  [1X07_NO_SILK]  59.69,68.07 180 top
JP154  [1X07_NO_SILK]  59.69,55.37 180 top
JP155  FIDUCIAL1X2  [FIDUCIAL-1X2]  40.64,68.07 0 top
JP156  FIDUCIAL1X2  [FIDUCIAL-1X2]  64.82,59.19 0 top
JP157  USB-MICROB"  [USB-B-MICRO-SMD_V03]  71.88,61.85 0 top
JP158  [1X06_NO_SILK]  96.52,55.37 90 top
JP159  [1X07_NO_SILK]  90.17,68.07 180 top
JP160  [1X07_NO_SILK]  90.17,55.37 180 top
JP161  FIDUCIAL1X2  [FIDUCIAL-1X2]  71.12,68.07 0 top
JP162  FIDUCIAL1X2  [FIDUCIAL-1X2]  95.3,59.19 0 top
JP163  USB-MICROB"  [USB-B-MICRO-SMD_V03]  102.36,61.85 0 top
JP164  [1X06_NO_SILK]  127,55.37 90 top
JP165  [1X07_NO_SILK]  120.65,68.07 180 top
JP166  [1X07_NO_SILK]  120.65,55.37 180 top
JP167  FIDUCIAL1X2  [FIDUCIAL-1X2]  101.6,68.07 0 top
JP168  FIDUCIAL1X2  [FIDUCIAL-1X2]  125.78,59.19 0 top
JP169  USB-MICROB"  [USB-B-MICRO-SMD_V03]  132.84,61.85 0 top
JP170  [1X06_NO_SILK]  157.48,55.37 90 top
JP171  [1X07_NO_SILK]  151.13,68.07 180 top
JP172  [1X07_NO_SILK]  151.13,55.37 180 top
JP173  FIDUCIAL1X2  [FIDUCIAL-1X2]  132.08,68.07 0 top
JP174  FIDUCIAL1X2  [FIDUCIAL-1X2]  156.26,59.19 0 top
JP175  USB-MICROB"  [USB-B-MICRO-SMD_V03]  163.32,61.85 0 top
JP176  [1X06_NO_SILK]  187.96,55.37 90 top
JP177  [1X07_NO_SILK]  181.61,68.07 180 top
JP178  [1X07_NO_SILK]  181.61,55.37 180 top
JP179  FIDUCIAL1X2  [FIDUCIAL-1X2]  162.56,68.07 0 top
JP180  FIDUCIAL1X2  [FIDUCIAL-1X2]  186.74,59.19 0 top
JP181  USB-MICROB"  [USB-B-MICRO-SMD_V03]  193.8,61.85 0 top
JP182  [1X06_NO_SILK]  218.44,55.37 90 top
JP183  [1X07_NO_SILK]  212.09,68.07 180 top
JP184  [1X07_NO_SILK]  212.09,55.37 180 top
JP185  FIDUCIAL1X2  [FIDUCIAL-1X2]  193.04,68.07 0 top
JP186  FIDUCIAL1X2  [FIDUCIAL-1X2]  217.22,59.19 0 top
JP187  USB-MICROB"  [USB-B-MICRO-SMD_V03]  224.28,61.85 0 top
JP188  [1X06_NO_SILK]  248.92,55.37 90 top
JP189  [1X07_NO_SILK]  242.57,68.07 180 top
JP190  [1X07_NO_SILK]  242.57,55.37 180 top
JP191  FIDUCIAL1X2  [FIDUCIAL-1X2]  223.52,68.07 0 top
JP192  FIDUCIAL1X2  [FIDUCIAL-1X2]  247.7,59.19 0 top
JP193  USB-MICROB"  [USB-B-MICRO-SMD_V03]  10.92,77.6 0 top
JP194  [1X06_NO_SILK]  35.56,71.12 90 top
JP195  [1X07_NO_SILK]  29.21,83.82 180 top
JP196  [1X07_NO_SILK]  29.21,71.12 180 top
JP197  FIDUCIAL1X2  [FIDUCIAL-1X2]  10.16,83.82 0 top
JP198  FIDUCIAL1X2  [FIDUCIAL-1X2]  34.34,74.94 0 top
JP199  USB-MICROB"  [USB-B-MICRO-SMD_V03]  41.4,77.6 0 top
JP200  [1X06_NO_SILK]  66.04,71.12 90 top
JP201  [1X07_NO_SILK]  59.69,83.82 180 top
JP202  [1X07_NO_SILK]  59.69,71.12 180 top
JP203  FIDUCIAL1X2  [FIDUCIAL-1X2]  40.64,83.82 0 top
JP204  FIDUCIAL1X2  [FIDUCIAL-1X2]  64.82,74.94 0 top
JP205  USB-MICROB"  [USB-B-MICRO-SMD_V03]  71.88,77.6 0 top
JP206  [1X06_NO_SILK]  96.52,71.12 90 top
JP207  [1X07_NO_SILK]  90.17,83.82 180 top
JP208  [1X07_NO_SILK]  90.17,71.12 180 top
JP209  FIDUCIAL1X2  [FIDUCIAL-1X2]  71.12,83.82 0 top
JP210  FIDUCIAL1X2  [FIDUCIAL-1X2]  95.3,74.94 0 top
JP211  USB-MICROB"  [USB-B-MICRO-SMD_V03]  102.36,77.6 0 top
JP212  [1X06_NO_SILK]  127,71.12 90 top
JP213  [1X07_NO_SILK]  120.65,83.82 180 top
JP214  [1X07_NO_SILK]  120.65,71.12 180 top
JP215  FIDUCIAL1X2  [FIDUCIAL-1X2]  101.6,83.82 0 top
JP216  FIDUCIAL1X2  [FIDUCIAL-1X2]  125.78,74.94 0 top
JP217  USB-MICROB"  [USB-B-MICRO-SMD_V03]  132.84,77.6 0 top
JP218  [1X06_NO_SILK]  157.48,71.12 90 top
JP219  [1X07_NO_SILK]  151.13,83.82 180 top
JP220  [1X07_NO_SILK]  151.13,71.12 180 top
JP221  FIDUCIAL1X2  [FIDUCIAL-1X2]  132.08,83.82 0 top
JP222  FIDUCIAL1X2  [FIDUCIAL-1X2]  156.26,74.94 0 top
JP223  USB-MICROB"  [USB-B-MICRO-SMD_V03]  163.32,77.6 0 top
JP224  [1X06_NO_SILK]  187.96,71.12 90 top
JP225  [1X07_NO_SILK]  181.61,83.82 180 top
JP226  [1X07_NO_SILK]  181.61,71.12 180 top
JP227  FIDUCIAL1X2  [FIDUCIAL-1X2]  162.56,83.82 0 top
JP228  FIDUCIAL1X2  [FIDUCIAL-1X2]  186.74,74.94 0 top
JP229  USB-MICROB"  [USB-B-MICRO-SMD_V03]  193.8,77.6 0 top
JP230  [1X06_NO_SILK]  218.44,71.12 90 top
JP231  [1X07_NO_SILK]  212.09,83.82 180 top
JP232  [1X07_NO_SILK]  212.09,71.12 180 top
JP233  FIDUCIAL1X2  [FIDUCIAL-1X2]  193.04,83.82 0 top
JP234  FIDUCIAL1X2  [FIDUCIAL-1X2]  217.22,74.94 0 top
JP235  USB-MICROB"  [USB-B-MICRO-SMD_V03]  224.28,77.6 0 top
JP236  [1X06_NO_SILK]  248.92,71.12 90 top
JP237  [1X07_NO_SILK]  242.57,83.82 180 top
JP238  [1X07_NO_SILK]  242.57,71.12 180 top
JP239  FIDUCIAL1X2  [FIDUCIAL-1X2]  223.52,83.82 0 top
JP240  FIDUCIAL1X2  [FIDUCIAL-1X2]  247.7,74.94 0 top
JP241  USB-MICROB"  [USB-B-MICRO-SMD_V03]  10.92,93.34 0 top
JP242  [1X06_NO_SILK]  35.56,86.87 90 top
JP243  [1X07_NO_SILK]  29.21,99.57 180 top
JP244  [1X07_NO_SILK]  29.21,86.87 180 top
JP245  FIDUCIAL1X2  [FIDUCIAL-1X2]  10.16,99.57 0 top
JP246  FIDUCIAL1X2  [FIDUCIAL-1X2]  34.34,90.69 0 top
JP247  USB-MICROB"  [USB-B-MICRO-SMD_V03]  41.4,93.34 0 top
JP248  [1X06_NO_SILK]  66.04,86.87 90 top
JP249  [1X07_NO_SILK]  59.69,99.57 180 top
JP250  [1X07_NO_SILK]  59.69,86.87 180 top
JP251  FIDUCIAL1X2  [FIDUCIAL-1X2]  40.64,99.57 0 top
JP252  FIDUCIAL1X2  [FIDUCIAL-1X2]  64.82,90.69 0 top
JP253  USB-MICROB"  [USB-B-MICRO-SMD_V03]  71.88,93.34 0 top
JP254  [1X06_NO_SILK]  96.52,86.87 90 top
JP255  [1X07_NO_SILK]  90.17,99.57 180 top
JP256  [1X07_NO_SILK]  90.17,86.87 180 top
JP257  FIDUCIAL1X2  [FIDUCIAL-1X2]  71.12,99.57 0 top
JP258  FIDUCIAL1X2  [FIDUCIAL-1X2]  95.3,90.69 0 top
JP259  USB-MICROB"  [USB-B-MICRO-SMD_V03]  102.36,93.34 0 top
JP260  [1X06_NO_SILK]  127,86.87 90 top
JP261  [1X07_NO_SILK]  120.65,99.57 180 top
JP262  [1X07_NO_SILK]  120.65,86.87 180 top
JP263  FIDUCIAL1X2  [FIDUCIAL-1X2]  101.6,99.57 0 top
JP264  FIDUCIAL1X2  [FIDUCIAL-1X2]  125.78,90.69 0 top
JP265  USB-MICROB"  [USB-B-MICRO-SMD_V03]  132.84,93.34 0 top
JP266  [1X06_NO_SILK]  157.48,86.87 90 top
JP267  [1X07_NO_SILK]  151.13,99.57 180 top
JP268  [1X07_NO_SILK]  151.13,86.87 180 top
JP269  FIDUCIAL1X2  [FIDUCIAL-1X2]  132.08,99.57 0 top
JP270  FIDUCIAL1X2  [FIDUCIAL-1X2]  156.26,90.69 0 top
JP271  USB-MICROB"  [USB-B-MICRO-SMD_V03]  163.32,93.34 0 top
JP272  [1X06_NO_SILK]  187.96,86.87 90 top
JP273  [1X07_NO_SILK]  181.61,99.57 180 top
JP274  [1X07_NO_SILK]  181.61,86.87 180 top
JP275  FIDUCIAL1X2  [FIDUCIAL-1X2]  162.56,99.57 0 top
JP276  FIDUCIAL1X2  [FIDUCIAL-1X2]  186.74,90.69 0 top
JP277  USB-MICROB"  [USB-B-MICRO-SMD_V03]  193.8,93.34 0 top
JP278  [1X06_NO_SILK]  218.44,86.87 90 top
JP279  [1X07_NO_SILK]  212.09,99.57 180 top
JP280  [1X07_NO_SILK]  212.09,86.87 180 top
JP281  FIDUCIAL1X2  [FIDUCIAL-1X2]  193.04,99.57 0 top
JP282  FIDUCIAL1X2  [FIDUCIAL-1X2]  217.22,90.69 0 top
JP283  USB-MICROB"  [USB-B-MICRO-SMD_V03]  224.28,93.34 0 top
JP284  [1X06_NO_SILK]  248.92,86.87 90 top
JP285  [1X07_NO_SILK]  242.57,99.57 180 top
JP286  [1X07_NO_SILK]  242.57,86.87 180 top
JP287  FIDUCIAL1X2  [FIDUCIAL-1X2]  223.52,99.57 0 top
JP288  FIDUCIAL1X2  [FIDUCIAL-1X2]  247.7,90.69 0 top
JP289  USB-MICROB"  [USB-B-MICRO-SMD_V03]  10.92,109.09 0 top
JP290  [1X06_NO_SILK]  35.56,102.62 90 top
JP291  [1X07_NO_SILK]  29.21,115.32 180 top
JP292  [1X07_NO_SILK]  29.21,102.62 180 top
JP293  FIDUCIAL1X2  [FIDUCIAL-1X2]  10.16,115.32 0 top
JP294  FIDUCIAL1X2  [FIDUCIAL-1X2]  34.34,106.44 0 top
JP295  USB-MICROB"  [USB-B-MICRO-SMD_V03]  41.4,109.09 0 top
JP296  [1X06_NO_SILK]  66.04,102.62 90 top
JP297  [1X07_NO_SILK]  59.69,115.32 180 top
JP298  [1X07_NO_SILK]  59.69,102.62 180 top
JP299  FIDUCIAL1X2  [FIDUCIAL-1X2]  40.64,115.32 0 top
JP300  FIDUCIAL1X2  [FIDUCIAL-1X2]  64.82,106.44 0 top
JP301  USB-MICROB"  [USB-B-MICRO-SMD_V03]  71.88,109.09 0 top
JP302  [1X06_NO_SILK]  96.52,102.62 90 top
JP303  [1X07_NO_SILK]  90.17,115.32 180 top
JP304  [1X07_NO_SILK]  90.17,102.62 180 top
JP305  FIDUCIAL1X2  [FIDUCIAL-1X2]  71.12,115.32 0 top
JP306  FIDUCIAL1X2  [FIDUCIAL-1X2]  95.3,106.44 0 top
JP307  USB-MICROB"  [USB-B-MICRO-SMD_V03]  102.36,109.09 0 top
JP308  [1X06_NO_SILK]  127,102.62 90 top
JP309  [1X07_NO_SILK]  120.65,115.32 180 top
JP310  [1X07_NO_SILK]  120.65,102.62 180 top
JP311  FIDUCIAL1X2  [FIDUCIAL-1X2]  101.6,115.32 0 top
JP312  FIDUCIAL1X2  [FIDUCIAL-1X2]  125.78,106.44 0 top
JP313  USB-MICROB"  [USB-B-MICRO-SMD_V03]  132.84,109.09 0 top
JP314  [1X06_NO_SILK]  157.48,102.62 90 top
JP315  [1X07_NO_SILK]  151.13,115.32 180 top
JP316  [1X07_NO_SILK]  151.13,102.62 180 top
JP317  FIDUCIAL1X2  [FIDUCIAL-1X2]  132.08,115.32 0 top
JP318  FIDUCIAL1X2  [FIDUCIAL-1X2]  156.26,106.44 0 top
JP319  USB-MICROB"  [USB-B-MICRO-SMD_V03]  163.32,109.09 0 top
JP320  [1X06_NO_SILK]  187.96,102.62 90 top
JP321  [1X07_NO_SILK]  181.61,115.32 180 top
JP322  [1X07_NO_SILK]  181.61,102.62 180 top
JP323  FIDUCIAL1X2  [FIDUCIAL-1X2]  162.56,115.32 0 top
JP324  FIDUCIAL1X2  [FIDUCIAL-1X2]  186.74,106.44 0 top
JP325  USB-MICROB"  [USB-B-MICRO-SMD_V03]  193.8,109.09 0 top
JP326  [1X06_NO_SILK]  218.44,102.62 90 top
JP327  [1X07_NO_SILK]  212.09,115.32 180 top
JP328  [1X07_NO_SILK]  212.09,102.62 180 top
JP329  FIDUCIAL1X2  [FIDUCIAL-1X2]  193.04,115.32 0 top
JP330  FIDUCIAL1X2  [FIDUCIAL-1X2]  217.22,106.44 0 top
JP331  USB-MICROB"  [USB-B-MICRO-SMD_V03]  224.28,109.09 0 top
JP332  [1X06_NO_SILK]  248.92,102.62 90 top
JP333  [1X07_NO_SILK]  242.57,115.32 180 top
JP334  [1X07_NO_SILK]  242.57,102.62 180 top
JP335  FIDUCIAL1X2  [FIDUCIAL-1X2]  223.52,115.32 0 top
JP336  FIDUCIAL1X2  [FIDUCIAL-1X2]  247.7,106.44 0 top
LOGO1  SFE_LOGO_NAME.1_INCH  [SFE_LOGO_NAME_.1]  22.86,12.45 0 bottom
LOGO2  SFE_LOGO_NAME.1_INCH  [SFE_LOGO_NAME_.1]  53.34,12.45 0 bottom
LOGO3  SFE_LOGO_NAME.1_INCH  [SFE_LOGO_NAME_.1]  83.82,12.45 0 bottom
LOGO4  SFE_LOGO_NAME.1_INCH  [SFE_LOGO_NAME_.1]  114.3,12.45 0 bottom
LOGO5  SFE_LOGO_NAME.1_INCH  [SFE_LOGO_NAME_.1]  144.78,12.45 0 bottom
LOGO6  SFE_LOGO_NAME.1_INCH  [SFE_LOGO_NAME_.1]  175.26,12.45 0 bottom
LOGO7  SFE_LOGO_NAME.1_INCH  [SFE_LOGO_NAME_.1]  205.74,12.45 0 bottom
LOGO8  SFE_LOGO_NAME.1_INCH  [SFE_LOGO_NAME_.1]  236.22,12.45 0 bottom
LOGO9  SFE_LOGO_NAME.1_INCH  [SFE_LOGO_NAME_.1]  22.86,28.19 0 bottom
LOGO10  SFE_LOGO_NAME.1_INCH  [SFE_LOGO_NAME_.1]  53.34,28.19 0 bottom
LOGO11  SFE_LOGO_NAME.1_INCH  [SFE_LOGO_NAME_.1]  83.82,28.19 0 bottom
LOGO12  SFE_LOGO_NAME.1_INCH  [SFE_LOGO_NAME_.1]  114.3,28.19 0 bottom
LOGO13  SFE_LOGO_NAME.1_INCH  [SFE_LOGO_NAME_.1]  144.78,28.19 0 bottom
LOGO14  SFE_LOGO_NAME.1_INCH  [SFE_LOGO_NAME_.1]  175.26,28.19 0 bottom
LOGO15  SFE_LOGO_NAME.1_INCH  [SFE_LOGO_NAME_.1]  205.74,28.19 0 bottom
LOGO16  SFE_LOGO_NAME.1_INCH  [SFE_LOGO_NAME_.1]  236.22,28.19 0 bottom
LOGO17  SFE_LOGO_NAME.1_INCH  [SFE_LOGO_NAME_.1]  22.86,43.94 0 bottom
LOGO18  SFE_LOGO_NAME.1_INCH  [SFE_LOGO_NAME_.1]  53.34,43.94 0 bottom
LOGO19  SFE_LOGO_NAME.1_INCH  [SFE_LOGO_NAME_.1]  83.82,43.94 0 bottom
LOGO20  SFE_LOGO_NAME.1_INCH  [SFE_LOGO_NAME_.1]  114.3,43.94 0 bottom
LOGO21  SFE_LOGO_NAME.1_INCH  [SFE_LOGO_NAME_.1]  144.78,43.94 0 bottom
LOGO22  SFE_LOGO_NAME.1_INCH  [SFE_LOGO_NAME_.1]  175.26,43.94 0 bottom
LOGO23  SFE_LOGO_NAME.1_INCH  [SFE_LOGO_NAME_.1]  205.74,43.94 0 bottom
LOGO24  SFE_LOGO_NAME.1_INCH  [SFE_LOGO_NAME_.1]  236.22,43.94 0 bottom
LOGO25  SFE_LOGO_NAME.1_INCH  [SFE_LOGO_NAME_.1]  22.86,59.69 0 bottom
LOGO26  SFE_LOGO_NAME.1_INCH  [SFE_LOGO_NAME_.1]  53.34,59.69 0 bottom
LOGO27  SFE_LOGO_NAME.1_INCH  [SFE_LOGO_NAME_.1]  83.82,59.69 0 bottom
LOGO28  SFE_LOGO_NAME.1_INCH  [SFE_LOGO_NAME_.1]  114.3,59.69 0 bottom
LOGO29  SFE_LOGO_NAME.1_INCH  [SFE_LOGO_NAME_.1]  144.78,59.69 0 bottom
LOGO30  SFE_LOGO_NAME.1_INCH  [SFE_LOGO_NAME_.1]  175.26,59.69 0 bottom
LOGO31  SFE_LOGO_NAME.1_INCH  [SFE_LOGO_NAME_.1]  205.74,59.69 0 bottom
LOGO32  SFE_LOGO_NAME.1_INCH  [SFE_LOGO_NAME_.1]  236.22,59.69 0 bottom
LOGO33  SFE_LOGO_NAME.1_INCH  [SFE_LOGO_NAME_.1]  22.86,75.44 0 bottom
LOGO34  SFE_LOGO_NAME.1_INCH  [SFE_LOGO_NAME_.1]  53.34,75.44 0 bottom
LOGO35  SFE_LOGO_NAME.1_INCH  [SFE_LOGO_NAME_.1]  83.82,75.44 0 bottom
LOGO36  SFE_LOGO_NAME.1_INCH  [SFE_LOGO_NAME_.1]  114.3,75.44 0 bottom
LOGO37  SFE_LOGO_NAME.1_INCH  [SFE_LOGO_NAME_.1]  144.78,75.44 0 bottom
LOGO38  SFE_LOGO_NAME.1_INCH  [SFE_LOGO_NAME_.1]  175.26,75.44 0 bottom
LOGO39  SFE_LOGO_NAME.1_INCH  [SFE_LOGO_NAME_.1]  205.74,75.44 0 bottom
LOGO40  SFE_LOGO_NAME.1_INCH  [SFE_LOGO_NAME_.1]  236.22,75.44 0 bottom
LOGO41  SFE_LOGO_NAME.1_INCH  [SFE_LOGO_NAME_.1]  22.86,91.19 0 bottom
LOGO42  SFE_LOGO_NAME.1_INCH  [SFE_LOGO_NAME_.1]  53.34,91.19 0 bottom
LOGO43  SFE_LOGO_NAME.1_INCH  [SFE_LOGO_NAME_.1]  83.82,91.19 0 bottom
LOGO44  SFE_LOGO_NAME.1_INCH  [SFE_LOGO_NAME_.1]  114.3,91.19 0 bottom
LOGO45  SFE_LOGO_NAME.1_INCH  [SFE_LOGO_NAME_.1]  144.78,91.19 0 bottom
LOGO46  SFE_LOGO_NAME.1_INCH  [SFE_LOGO_NAME_.1]  175.26,91.19 0 bottom
LOGO47  SFE_LOGO_NAME.1_INCH  [SFE_LOGO_NAME_.1]  205.74,91.19 0 bottom
LOGO48  SFE_LOGO_NAME.1_INCH  [SFE_LOGO_NAME_.1]  236.22,91.19 0 bottom
LOGO49  SFE_LOGO_NAME.1_INCH  [SFE_LOGO_NAME_.1]  22.86,106.93 0 bottom
LOGO50  SFE_LOGO_NAME.1_INCH  [SFE_LOGO_NAME_.1]  53.34,106.93 0 bottom
LOGO51  SFE_LOGO_NAME.1_INCH  [SFE_LOGO_NAME_.1]  83.82,106.93 0 bottom
LOGO52  SFE_LOGO_NAME.1_INCH  [SFE_LOGO_NAME_.1]  114.3,106.93 0 bottom
LOGO53  SFE_LOGO_NAME.1_INCH  [SFE_LOGO_NAME_.1]  144.78,106.93 0 bottom
LOGO54  SFE_LOGO_NAME.1_INCH  [SFE_LOGO_NAME_.1]  175.26,106.93 0 bottom
LOGO55  SFE_LOGO_NAME.1_INCH  [SFE_LOGO_NAME_.1]  205.74,106.93 0 bottom
LOGO56  SFE_LOGO_NAME.1_INCH  [SFE_LOGO_NAME_.1]  236.22,106.93 0 bottom
Q1  2N7002PW  [SOT323]  32.87,18.24 270 top
Q2  2N7002PW  [SOT323]  63.35,18.24 270 top
Q3  2N7002PW  [SOT323]  93.83,18.24 270 top
Q4  2N7002PW  [SOT323]  124.31,18.24 270 top
Q5  2N7002PW  [SOT323]  154.79,18.24 270 top
Q6  2N7002PW  [SOT323]  185.27,18.24 270 top
Q7  2N7002PW  [SOT323]  215.75,18.24 270 top
Q8  2N7002PW  [SOT323]  246.23,18.24 270 top
Q9  2N7002PW  [SOT323]  32.87,33.99 270 top
Q10  2N7002PW  [SOT323]  63.35,33.99 270 top
Q11  2N7002PW  [SOT323]  93.83,33.99 270 top
Q12  2N7002PW  [SOT323]  124.31,33.99 270 top
Q13  2N7002PW  [SOT323]  154.79,33.99 270 top
Q14  2N7002PW  [SOT323]  185.27,33.99 270 top
Q15  2N7002PW  [SOT323]  215.75,33.99 270 top
Q16  2N7002PW  [SOT323]  246.23,33.99 270 top
Q17  2N7002PW  [SOT323]  32.87,49.73 270 top
Q18  2N7002PW  [SOT323]  63.35,49.73 270 top
Q19  2N7002PW  [SOT323]  93.83,49.73 270 top
Q20  2N7002PW  [SOT323]  124.31,49.73 270 top
Q21  2N7002PW  [SOT323]  154.79,49.73 270 top
Q22  2N7002PW  [SOT323]  185.27,49.73 270 top
Q23  2N7002PW  [SOT323]  215.75,49.73 270 top
Q24  2N7002PW  [SOT323]  246.23,49.73 270 top
Q25  2N7002PW  [SOT323]  32.87,65.48 270 top
Q26  2N7002PW  [SOT323]  63.35,65.48 270 top
Q27  2N7002PW  [SOT323]  93.83,65.48 270 top
Q28  2N7002PW  [SOT323]  124.31,65.48 270 top
Q29  2N7002PW  [SOT323]  154.79,65.48 270 top
Q30  2N7002PW  [SOT323]  185.27,65.48 270 top
Q31  2N7002PW  [SOT323]  215.75,65.48 270 top
Q32  2N7002PW  [SOT323]  246.23,65.48 270 top
Q33  2N7002PW  [SOT323]  32.87,81.23 270 top
Q34  2N7002PW  [SOT323]  63.35,81.23 270 top
Q35  2N7002PW  [SOT323]  93.83,81.23 270 top
Q36  2N7002PW  [SOT323]  124.31,81.23 270 top
Q37  2N7002PW  [SOT323]  154.79,81.23 270 top
Q38  2N7002PW  [SOT323]  185.27,81.23 270 top
Q39  2N7002PW  [SOT323]  215.75,81.23 270 top
Q40  2N7002PW  [SOT323]  246.23,81.23 270 top
Q41  2N7002PW  [SOT323]  32.87,96.98 270 top
Q42  2N7002PW  [SOT323]  63.35,96.98 270 top
Q43  2N7002PW  [SOT323]  93.83,96.98 270 top
Q44  2N7002PW  [SOT323]  124.31,96.98 270 top
Q45  2N7002PW  [SOT323]  154.79,96.98 270 top
Q46  2N7002PW  [SOT323]  185.27,96.98 270 top
Q47  2N7002PW  [SOT323]  215.75,96.98 270 top
Q48  2N7002PW  [SOT323]  246.23,96.98 270 top
Q49  2N7002PW  [SOT323]  32.87,112.73 270 top
Q50  2N7002PW  [SOT323]  63.35,112.73 270 top
Q51  2N7002PW  [SOT323]  93.83,112.73 270 top
Q52  2N7002PW  [SOT323]  124.31,112.73 270 top
Q53  2N7002PW  [SOT323]  154.79,112.73 270 top
Q54  2N7002PW  [SOT323]  185.27,112.73 270 top
Q55  2N7002PW  [SOT323]  215.75,112.73 270 top
Q56  2N7002PW  [SOT323]  246.23,112.73 270 top
R1  27  [0603-RES]  17.78,15.11 0 top
R2  27  [0603-RES]  17.78,13.84 180 top
R3  1K  [0603-RES]  17.78,17.65 0 top
R4  1K  [0603-RES]  17.78,11.3 0 top
R5  10k  [0603-RES@1]  31.65,15.75 0 top
R6  10k  [0603-RES@1]  32.21,20.83 180 top
R7  27  [0603-RES]  48.26,15.11 0 top
R8  27  [0603-RES]  48.26,13.84 180 top
R9  1K  [0603-RES]  48.26,17.65 0 top
R10  1K  [0603-RES]  48.26,11.3 0 top
R11  10k  [0603-RES@1]  62.13,15.75 0 top
R12  10k  [0603-RES@1]  62.69,20.83 180 top
R13  27  [0603-RES]  78.74,15.11 0 top
R14  27  [0603-RES]  78.74,13.84 180 top
R15  1K  [0603-RES]  78.74,17.65 0 top
R16  1K  [0603-RES]  78.74,11.3 0 top
R17  10k  [0603-RES@1]  92.61,15.75 0 top
R18  10k  [0603-RES@1]  93.17,20.83 180 top
R19  27  [0603-RES]  109.22,15.11 0 top
R20  27  [0603-RES]  109.22,13.84 180 top
R21  1K  [0603-RES]  109.22,17.65 0 top
R22  1K  [0603-RES]  109.22,11.3 0 top
R23  10k  [0603-RES@1]  123.09,15.75 0 top
R24  10k  [0603-RES@1]  123.65,20.83 180 top
R25  27  [0603-RES]  139.7,15.11 0 top
R26  27  [0603-RES]  139.7,13.84 180 top
R27  1K  [0603-RES]  139.7,17.65 0 top
R28  1K  [0603-RES]  139.7,11.3 0 top
R29  10k  [0603-RES@1]  153.57,15.75 0 top
R30  10k  [0603-RES@1]  154.13,20.83 180 top
R31  27  [0603-RES]  170.18,15.11 0 top
R32  27  [0603-RES]  170.18,13.84 180 top
R33  1K  [0603-RES]  170.18,17.65 0 top
R34  1K  [0603-RES]  170.18,11.3 0 top
R35  10k  [0603-RES@1]  184.05,15.75 0 top
R36  10k  [0603-RES@1]  184.61,20.83 180 top
R37  27  [0603-RES]  200.66,15.11 0 top
R38  27  [0603-RES]  200.66,13.84 180 top
R39  1K  [0603-RES]  200.66,17.65 0 top
R40  1K  [0603-RES]  200.66,11.3 0 top
R41  10k  [0603-RES@1]  214.53,15.75 0 top
R42  10k  [0603-RES@1]  215.09,20.83 180 top
R43  27  [0603-RES]  231.14,15.11 0 top
R44  27  [0603-RES]  231.14,13.84 180 top
R45  1K  [0603-RES]  231.14,17.65 0 top
R46  1K  [0603-RES]  231.14,11.3 0 top
R47  10k  [0603-RES@1]  245.01,15.75 0 top
R48  10k  [0603-RES@1]  245.57,20.83 180 top
R49  27  [0603-RES]  17.78,30.86 0 top
R50  27  [0603-RES]  17.78,29.59 180 top
R51  1K  [0603-RES]  17.78,33.4 0 top
R52  1K  [0603-RES]  17.78,27.05 0 top
R53  10k  [0603-RES@1]  31.65,31.5 0 top
R54  10k  [0603-RES@1]  32.21,36.58 180 top
R55  27  [0603-RES]  48.26,30.86 0 top
R56  27  [0603-RES]  48.26,29.59 180 top
R57  1K  [0603-RES]  48.26,33.4 0 top
R58  1K  [0603-RES]  48.26,27.05 0 top
R59  10k  [0603-RES@1]  62.13,31.5 0 top
R60  10k  [0603-RES@1]  62.69,36.58 180 top
R61  27  [0603-RES]  78.74,30.86 0 top
R62  27  [0603-RES]  78.74,29.59 180 top
R63  1K  [0603-RES]  78.74,33.4 0 top
R64  1K  [0603-RES]  78.74,27.05 0 top
R65  10k  [0603-RES@1]  92.61,31.5 0 top
R66  10k  [0603-RES@1]  93.17,36.58 180 top
R67  27  [0603-RES]  109.22,30.86 0 top
R68  27  [0603-RES]  109.22,29.59 180 top
R69  1K  [0603-RES]  109.22,33.4 0 top
R70  1K  [0603-RES]  109.22,27.05 0 top
R71  10k  [0603-RES@1]  123.09,31.5 0 top
R72  10k  [0603-RES@1]  123.65,36.58 180 top
R73  27  [0603-RES]  139.7,30.86 0 top
R74  27  [0603-RES]  139.7,29.59 180 top
R75  1K  [0603-RES]  139.7,33.4 0 top
R76  1K  [0603-RES]  139.7,27.05 0 top
R77  10k  [0603-RES@1]  153.57,31.5 0 top
R78  10k  [0603-RES@1]  154.13,36.58 180 top
R79  27  [0603-RES]  170.18,30.86 0 top
R80  27  [0603-RES]  170.18,29.59 180 top
R81  1K  [0603-RES]  170.18,33.4 0 top
R82  1K  [0603-RES]  170.18,27.05 0 top
R83  10k  [0603-RES@1]  184.05,31.5 0 top
R84  10k  [0603-RES@1]  184.61,36.58 180 top
R85  27  [0603-RES]  200.66,30.86 0 top
R86  27  [0603-RES]  200.66,29.59 180 top
R87  1K  [0603-RES]  200.66,33.4 0 top
R88  1K  [0603-RES]  200.66,27.05 0 top
R89  10k  [0603-RES@1]  214.53,31.5 0 top
R90  10k  [0603-RES@1]  215.09,36.58 180 top
R91  27  [0603-RES]  231.14,30.86 0 top
R92  27  [0603-RES]  231.14,29.59 180 top
R93  1K  [0603-RES]  231.14,33.4 0 top
R94  1K  [0603-RES]  231.14,27.05 0 top
R95  10k  [0603-RES@1]  245.01,31.5 0 top
R96  10k  [0603-RES@1]  245.57,36.58 180 top
R97  27  [0603-RES]  17.78,46.61 0 top
R98  27  [0603-RES]  17.78,45.34 180 top
R99  1K  [0603-RES]  17.78,49.15 0 top
R100  1K  [0603-RES]  17.78,42.8 0 top
R101  10k  [0603-RES@1]  31.65,47.24 0 top
R102  10k  [0603-RES@1]  32.21,52.32 180 top
R103  27  [0603-RES]  48.26,46.61 0 top
R104  27  [0603-RES]  48.26,45.34 180 top
R105  1K  [0603-RES]  48.26,49.15 0 top
R106  1K  [0603-RES]  48.26,42.8 0 top
R107  10k  [0603-RES@1]  62.13,47.24 0 top
R108  10k  [0603-RES@1]  62.69,52.32 180 top
R109  27  [0603-RES]  78.74,46.61 0 top
R110  27  [0603-RES]  78.74,45.34 180 top
R111  1K  [0603-RES]  78.74,49.15 0 top
R112  1K  [0603-RES]  78.74,42.8 0 top
R113  10k  [0603-RES@1]  92.61,47.24 0 top
R114  10k  [0603-RES@1]  93.17,52.32 180 top
R115  27  [0603-RES]  109.22,46.61 0 top
R116  27  [0603-RES]  109.22,45.34 180 top
R117  1K  [0603-RES]  109.22,49.15 0 top
R118  1K  [0603-RES]  109.22,42.8 0 top
R119  10k  [0603-RES@1]  123.09,47.24 0 top
R120  10k  [0603-RES@1]  123.65,52.32 180 top
R121  27  [0603-RES]  139.7,46.61 0 top
R122  27  [0603-RES]  139.7,45.34 180 top
R123  1K  [0603-RES]  139.7,49.15 0 top
R124  1K  [0603-RES]  139.7,42.8 0 top
R125  10k  [0603-RES@1]  153.57,47.24 0 top
R126  10k  [0603-RES@1]  154.13,52.32 180 top
R127  27  [0603-RES]  170.18,46.61 0 top
R128  27  [0603-RES]  170.18,45.34 180 top
R129  1K  [0603-RES]  170.18,49.15 0 top
R130  1K  [0603-RES]  170.18,42.8 0 top
R131  10k  [0603-RES@1]  184.05,47.24 0 top
R132  10k  [0603-RES@1]  184.61,52.32 180 top
R133  27  [0603-RES]  200.66,46.61 0 top
R134  27  [0603-RES]  200.66,45.34 180 top
R135  1K  [0603-RES]  200.66,49.15 0 top
R136  1K  [0603-RES]  200.66,42.8 0 top
R137  10k  [0603-RES@1]  214.53,47.24 0 top
R138  10k  [0603-RES@1]  215.09,52.32 180 top
R139  27  [0603-RES]  231.14,46.61 0 top
R140  27  [0603-RES]  231.14,45.34 180 top
R141  1K  [0603-RES]  231.14,49.15 0 top
R142  1K  [0603-RES]  231.14,42.8 0 top
R143  10k  [0603-RES@1]  245.01,47.24 0 top
R144  10k  [0603-RES@1]  245.57,52.32 180 top
R145  27  [0603-RES]  17.78,62.36 0 top
R146  27  [0603-RES]  17.78,61.09 180 top
R147  1K  [0603-RES]  17.78,64.9 0 top
R148  1K  [0603-RES]  17.78,58.55 0 top
R149  10k  [0603-RES@1]  31.65,62.99 0 top
R150  10k  [0603-RES@1]  32.21,68.07 180 top
R151  27  [0603-RES]  48.26,62.36 0 top
R152  27  [0603-RES]  48.26,61.09 180 top
R153  1K  [0603-RES]  48.26,64.9 0 top
R154  1K  [0603-RES]  48.26,58.55 0 top
R155  10k  [0603-RES@1]  62.13,62.99 0 top
R156  10k  [0603-RES@1]  62.69,68.07 180 top
R157  27  [0603-RES]  78.74,62.36 0 top
R158  27  [0603-RES]  78.74,61.09 180 top
R159  1K  [0603-RES]  78.74,64.9 0 top
R160  1K  [0603-RES]  78.74,58.55 0 top
R161  10k  [0603-RES@1]  92.61,62.99 0 top
R162  10k  [0603-RES@1]  93.17,68.07 180 top
R163  27  [0603-RES]  109.22,62.36 0 top
R164  27  [0603-RES]  109.22,61.09 180 top
R165  1K  [0603-RES]  109.22,64.9 0 top
R166  1K  [0603-RES]  109.22,58.55 0 top
R167  10k  [0603-RES@1]  123.09,62.99 0 top
R168  10k  [0603-RES@1]  123.65,68.07 180 top
R169  27  [0603-RES]  139.7,62.36 0 top
R170  27  [0603-RES]  139.7,61.09 180 top
R171  1K  [0603-RES]  139.7,64.9 0 top
R172  1K  [0603-RES]  139.7,58.55 0 top
R173  10k  [0603-RES@1]  153.57,62.99 0 top
R174  10k  [0603-RES@1]  154.13,68.07 180 top
R175  27  [0603-RES]  170.18,62.36 0 top
R176  27  [0603-RES]  170.18,61.09 180 top